# Altium PCB Shield Arduino Manual.PcbDoc
Units mm, origin at the board's own origin, x right, y up, seen from the top; angles counter-clockwise.
Board outline 152.4 x 101.6 mm, 2 copper layers (Top Layer, Bottom Layer); 19 components, 0 nets, 111 pads, 0 vias.
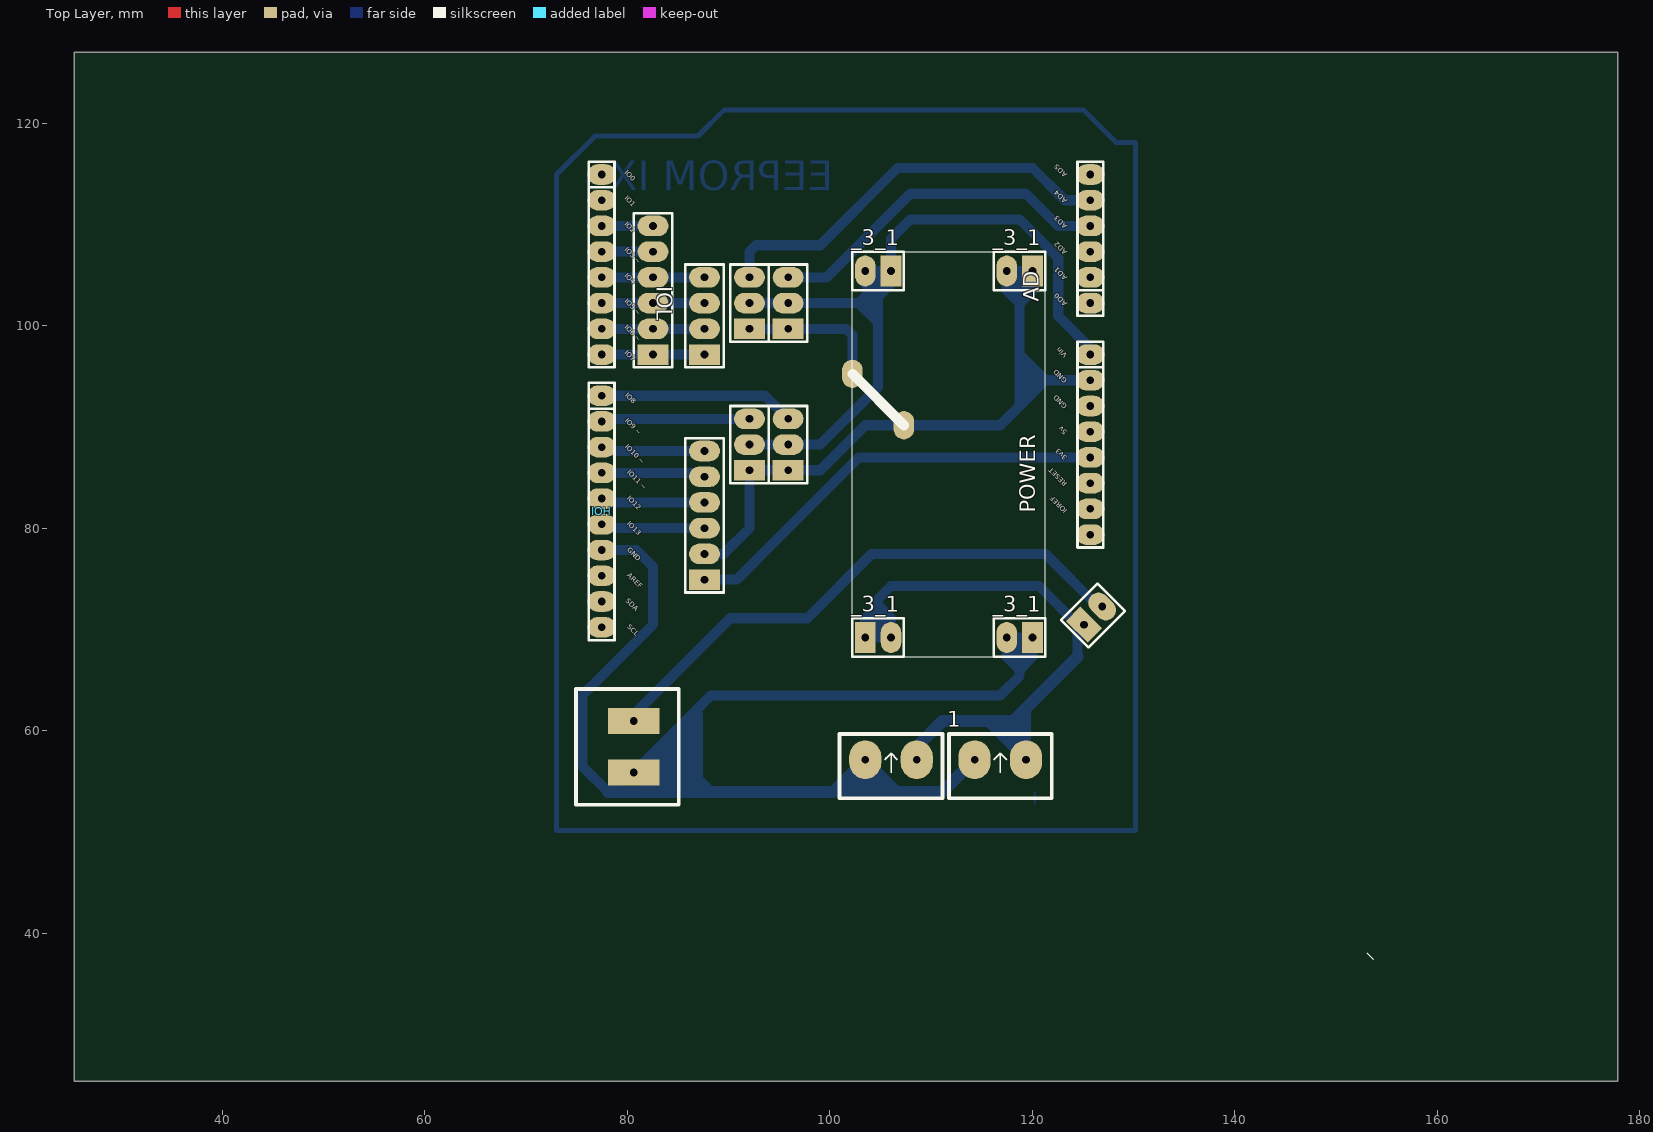
[diagram p0: Top Layer view]
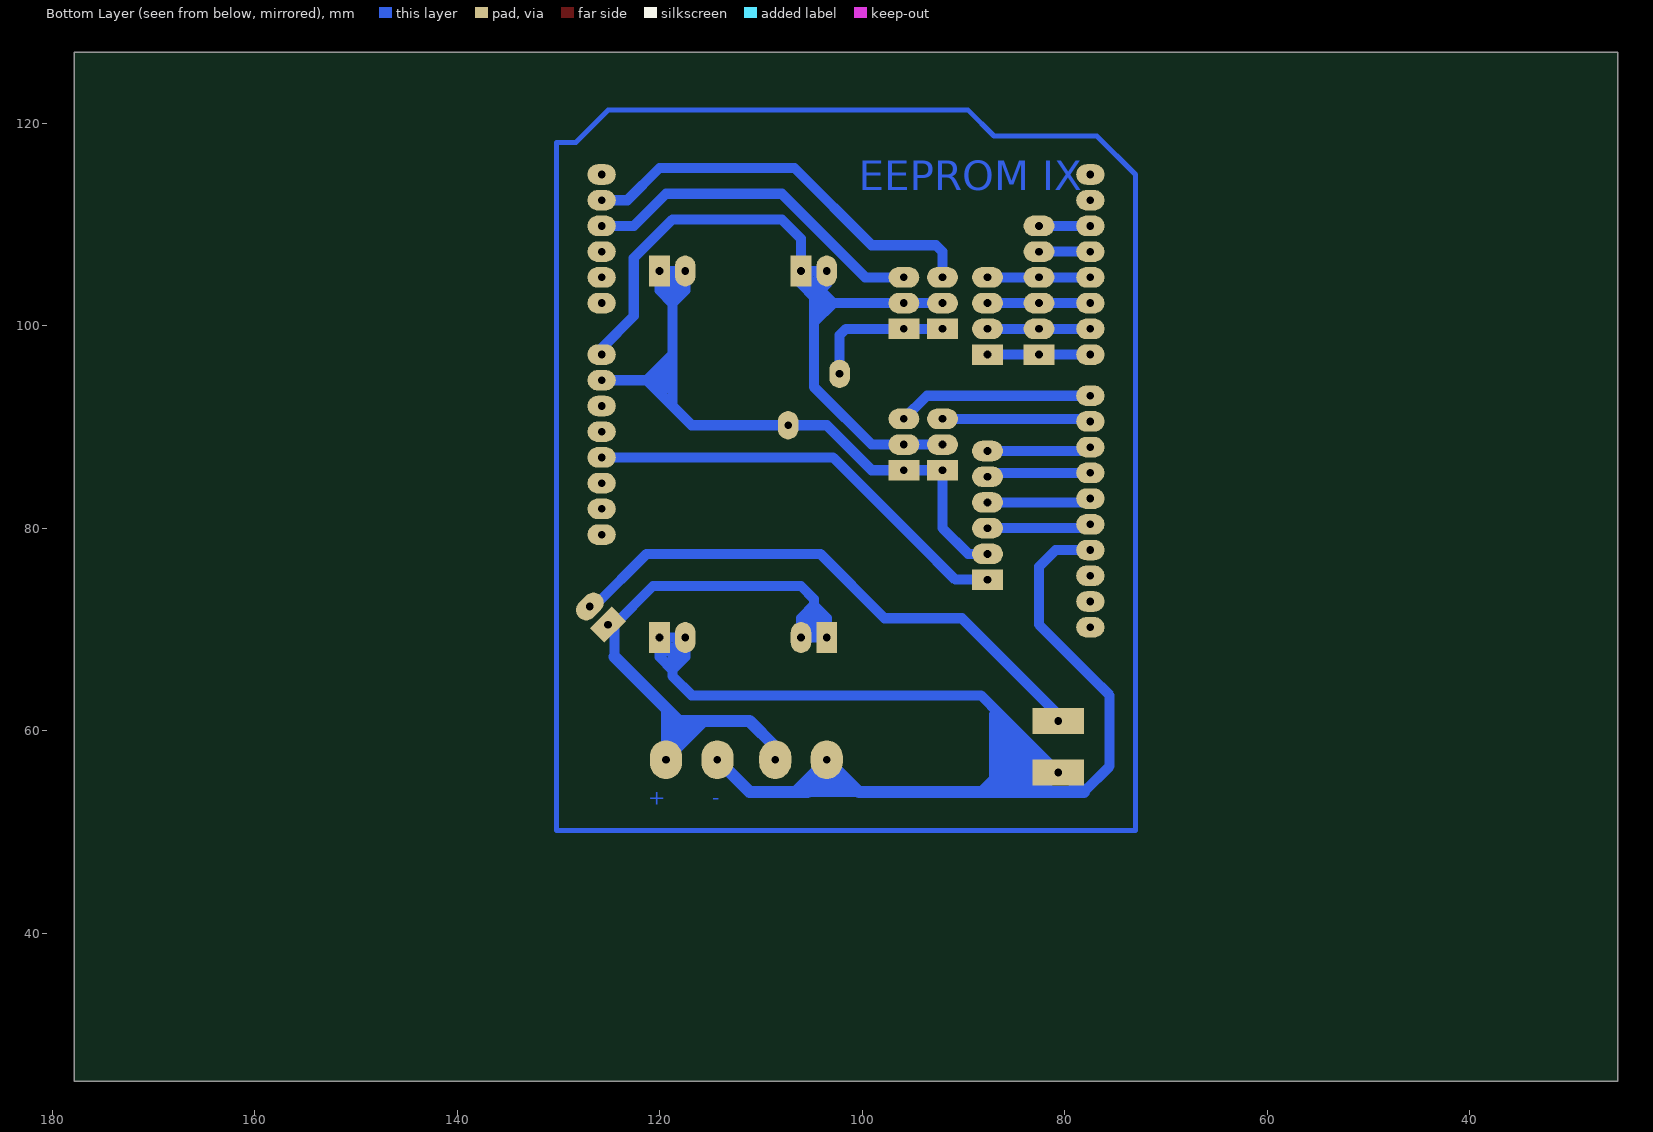
[diagram p1: Bottom Layer view, seen from below]

## Layer stack, top to bottom
Top Layer: signal copper 0.0356
Dielectric: dielectric 0.32, FR-4, Dk 4.8
Bottom Layer: signal copper 0.0356

## Board outline
25.4,25.4 177.8,25.4 177.8,127 25.4,127

## Design rules (kind name [scope] priority, off if disabled: settings)
Clearance [All] p1: gap=0.254
PolygonConnect [All] p1: connectstyle=Relief reliefconductorwidth=0.254 reliefentries=4 polygonreliefangle="90 Angle"
RoutingVias [All] p1: holewidth=0.711 width=1.27 viastyle="Through Hole" minholewidth=0.711 minwidth=1.27 maxholewidth=0.711 maxwidth=1.27
SilkscreenOverComponentPads [All] p1: minsilkscreentomaskgap=0.254
SolderMaskExpansion [All] p1: expansion=0.102
Width [All] p1: maxlimit=0.254 minlimit=0.254 preferedwidth=0.254
27 further rules are at their usual default settings.

## Components (designator, comment, footprint, x,y, rotation, side; value= is the part's Value field where it differs from the comment)
1 "Comment" CON_TSCRW2_STD 114.3,57.15 r0 top
_3_1 "Comment" HDR_1X2-80-120 103.505,69.215 r0 top
_3_1 "Comment" HDR_1X2-80-120 120.015,69.215 r180 top
_3_1 "Comment" HDR_1X2-80-120 120.015,105.41 r180 top
_3_1 "Comment" HDR_1X2-80-120 106.045,105.41 r180 top
AD "AD" "Header 6x1 8.5mm" 125.73,102.235 r90 top locked
IOH "IOH" "Header 10x1 8.5mm" 77.47,93.091 r270 top locked
IOL "IOL" "Header 8x1 8.5mm" 77.47,114.935 r270 top locked
POWER "POWER_UNO" "Header 8x1 8.5mm" 125.73,97.155 r270 top locked
? "Comment" CON_TSCRW2_STD 103.505,57.15 r0 top
? "Comment" SWKOTAK_ONOFF 80.01,58.42 r90 top
? "Comment" HDR_1X2-80-120 125.095,70.485 r45 top
? "Comment" HDR_1X4-80-120 87.63,97.155 r90 top
? "Comment" HDR_1X6-80-120 82.55,97.155 r90 top
? "Comment" HDR_1X3-80-120 92.075,99.695 r90 top
? "Comment" HDR_1X3-80-120 95.885,99.695 r90 top
? "Comment" HDR_1X3-80-120 92.075,85.725 r90 top
? "Comment" HDR_1X3-80-120 95.885,85.725 r90 top
? "Comment" HDR_1X6-80-120 87.63,74.93 r90 top

## Footprints (in the part's own frame and the unit in brackets; to place one, negate y for a bottom-side part, rotate by r counter-clockwise, add the part's x,y. Pads: shape width x height; smd on the part's side, far side on the other; paste and mask are expansions set on the pad)
CON_TSCRW2_STD [mil]
  oval 125x150 hole 30: 1(0,0) 2(200,0)
  silkscreen extent -100,-150 300,100
HDR_1X2-80-120 [mil]
  rect 80x120 hole 30: 1(0,0)
  oval 80x120 hole 30: 2(100,0)
  silkscreen extent -50,-75 150,75
HDR_1X3-80-120 [mil]
  rect 80x120 hole 30: 1(0,0)
  oval 80x120 hole 30: 2(100,0) 3(200,0)
  silkscreen extent -50,-75 250,75
HDR_1X4-80-120 [mil]
  rect 80x120 hole 30: 1(0,0)
  oval 80x120 hole 30: 2(100,0) 3(200,0) 4(300,0)
  silkscreen extent -50,-75 350,75
HDR_1X6-80-120 [mil]
  rect 80x120 hole 30: 1(0,0)
  oval 80x120 hole 30: 2(100,0) 3(200,0) 4(300,0) 5(400,0) 6(500,0)
  silkscreen extent -50,-75 550,75
"Header 6x1 8.5mm" [mil] "Stackable 6 pin header"
  rect 60x60 hole 30: 1(0,0)
  round 60 hole 30: 2(100,0) 3(200,0) 4(300,0) 5(400,0) 6(500,0)
  silkscreen extent -50,-50 550,50, body extent -50,-50 550,50, height 335
"Header 8x1 8.5mm" [mil] "Stackable 8 pin header"
  rect 60x60 hole 30: 1(0,0)
  round 60 hole 30: 2(100,0) 3(200,0) 4(300,0) 5(400,0) 6(500,0) 7(600,0) 8(700,0)
  silkscreen extent -50,-50 750,50, body extent -50,-50 750,50, height 335
"Header 10x1 8.5mm" [mil] "Stackable 10 pin header"
  rect 60x60 hole 30: 1(0,0)
  round 60 hole 30: 2(100,0) 3(200,0) 4(300,0) 5(400,0) 6(500,0) 7(600,0) 8(700,0) 9(800,0) 10(900,0)
  silkscreen extent -50,-50 950,50, body extent -50,-50 950,50, height 335
SWKOTAK_ONOFF [mil]
  rect 100x200 hole 30: 1(-100,-25) 2(100,-25)
  rect 40x40 on Top Overlay: 3(0,0)
  silkscreen extent -225,-200 225,200

## Free pads (board coordinates)
  oval 2.794x2.032 hole 0.762: 0(77.47,70.231) 1(77.47,72.771) 2(77.47,75.311) 3(77.47,77.851) 4(77.47,80.391) 5(77.47,82.931) 6(77.47,85.471) 7(77.47,88.011) 8(77.47,90.551) 9(77.47,93.091) 10(77.47,97.155) 11(77.47,99.695) 12(77.47,102.235) 13(77.47,104.775) 14(77.47,107.315) 15(77.47,109.855) 16(77.47,112.395) 17(77.47,114.935) 18(125.73,114.935) 19(125.73,112.395) 20(125.73,109.855) 21(125.73,107.315) 22(125.73,104.775) 23(125.73,102.235) 24(125.73,97.155) 25(125.73,94.615) 26(125.73,92.075) 27(125.73,89.535) 28(125.73,86.995) 29(125.73,84.455) 30(125.73,81.915) 31(125.73,79.375)
  oval 2.032x2.794 hole 0.762: 0(102.235,95.25) 1(107.315,90.17)

## Nets (pads, with @x,y where several pads share a name; then routed paths per layer and width w, separated by ;. In a path a pad name is that pad's centre, name@x,y a point inside that pad or via, vN(x,y) a via of type N, cw(c..) or ccw(c..) an arc to the next point about the centre after c; other vN are vias at no path point)
pads on no net: 1.1 1.2 ?.1 ?.2 ?.3 ?.4 ?.5 ?.6 _3_1.1 _3_1.2 AD.1 AD.2 AD.3 AD.4 AD.5 AD.6 IOH.1 IOH.2 IOH.3 IOH.4 IOH.5 IOH.6 IOH.7 IOH.8 IOH.9 IOH.10 IOL.1 IOL.2 IOL.3 IOL.4 IOL.5 IOL.6 IOL.7 IOL.8 POWER.1 POWER.2 POWER.3 POWER.4 POWER.5 POWER.6 POWER.7 POWER.8
copper on no net: | length 1383.5
  Bottom Layer w0: 121.285,94.615 125.73,94.615
  Bottom Layer w0.5: 73.025,50.165 73.025,57.15 73.025,114.935 76.835,118.745 86.995,118.745 89.535,121.285 97.79,121.285 125.095,121.285 128.27,118.11 130.175,118.11 130.175,99.695 130.175,50.165 73.025,50.165
  Bottom Layer w0.9: 117.475,69.215 120.015,69.215
  Bottom Layer w1: 77.47,77.851 80.264,77.851 80.899,77.851 82.55,76.2 82.55,70.485 80.645,68.58 77.47,65.405 75.565,63.5 75.565,57.785 75.565,56.515 78.105,53.975 83.185,53.975 ; 77.47,80.391 77.851,80.01 87.63,80.01 ; 77.47,90.551 77.724,90.805 92.075,90.805 ; 77.47,93.091 93.599,93.091 95.885,90.805 ; 77.47,97.155 82.55,97.155 87.63,97.155 ; 77.47,99.695 82.55,99.695 87.63,99.695 ; 77.47,102.235 82.55,102.235 87.63,102.235 ; 77.47,104.775 82.55,104.775 87.63,104.775 ; 77.47,107.315 82.55,107.315 ; 77.47,109.855 82.55,109.855 ; 78.359,82.931 77.47,82.931 77.851,82.55 87.63,82.55 ; 78.359,85.471 77.47,85.471 ; 80.645,60.96 80.645,61.595 90.17,71.12 93.345,71.12 97.79,71.12 104.14,77.47 121.285,77.47 126.474,72.281 126.891,72.281 ; 82.296,85.471 77.47,85.471 ; 87.63,74.93 90.805,74.93 94.615,78.74 102.87,86.995 125.73,86.995 ; 87.63,77.47 89.535,77.47 92.075,80.01 92.075,85.725 95.885,85.725 99.06,85.725 103.505,90.17 104.775,90.17 112.395,90.17 116.84,90.17 121.285,94.615 ; 87.63,85.09 87.249,85.471 77.47,85.471 ; 87.63,87.63 77.851,87.63 ; 92.075,88.265 95.885,88.265 99.06,88.265 104.14,93.345 104.775,93.98 104.775,102.87 ; 92.075,99.695 95.885,99.695 101.6,99.695 102.235,99.06 102.235,95.25 ; 92.075,102.235 95.885,102.235 102.87,102.235 ; 92.075,104.775 92.075,107.315 92.71,107.95 99.06,107.95 106.68,115.57 120.015,115.57 123.19,112.395 125.095,112.395 ; 95.885,104.775 99.695,104.775 107.95,113.03 119.38,113.03 122.555,109.855 125.73,109.855 ; 102.235,53.975 102.87,53.975 103.505,54.61 ; 108.585,57.15 108.585,58.42 111.125,60.96 118.11,60.96 ; 114.3,57.15 111.125,53.975 105.41,53.975 ; 119.38,96.52 119.38,95.25 ; 125.095,70.485 124.46,70.485 ; 125.73,94.615 121.285,94.615 ; 125.73,97.155 125.73,97.79 122.555,100.965 122.555,106.68 118.745,110.49 107.95,110.49 106.045,108.585 106.045,105.41 ; 77.851,87.63 77.47,88.011 77.851,87.63 ; 80.645,55.88 86.36,61.595 ; 80.645,55.88 83.82,55.88 ; 80.645,55.88 82.55,53.975 ; 80.645,55.88 81.28,55.245 ; 81.28,55.245 84.455,55.245 ; 81.28,55.245 85.725,59.69 ; 81.28,55.245 83.185,55.245 83.82,55.88 ; 82.55,53.975 85.725,53.975 ; 82.55,53.975 83.185,53.975 ; 82.55,53.975 83.82,55.245 84.455,55.245 ; 83.185,53.975 86.36,57.15 ; 83.185,53.975 84.455,55.245 ; 83.185,53.975 84.455,55.245 ; 83.185,53.975 84.455,55.245 ; 83.185,53.975 84.455,55.245 ; 83.185,53.975 83.185,57.15 ; 83.185,57.15 85.09,57.15 ; 83.185,57.15 86.36,57.15 ; 83.185,57.15 85.725,59.69 ; 83.82,55.88 86.995,59.055 ; 83.82,55.88 85.725,53.975 ; 83.82,55.88 86.36,55.88 ; 83.82,55.88 84.455,55.245 ; 83.82,55.88 85.09,57.15 ; 83.82,55.88 86.36,55.88 ; 83.82,55.88 85.725,53.975 ; 83.82,55.88 83.82,58.42 ; 83.82,55.88 86.995,59.055 ; 83.82,55.88 85.09,57.15 ; 83.82,55.88 84.455,55.245 ; 83.82,55.88 83.82,58.42 ; 83.82,58.42 83.82,59.055 84.446,59.681 84.455,59.69 ; 83.82,58.42 83.185,57.785 85.725,55.245 ; 84.455,55.245 85.725,53.975 ; 84.455,55.245 84.455,59.69 ; 84.455,55.245 84.455,59.69 ; 84.455,55.245 85.725,55.245 ; 84.455,55.245 84.455,56.515 86.36,58.42 ; 84.455,55.245 85.725,55.245 ; 84.455,59.69 85.09,59.055 ; 85.09,57.15 86.36,57.15 ; 85.09,57.15 86.36,55.88 ; 85.09,57.15 88.265,53.975 ; 85.09,57.15 85.09,59.055 ; 85.09,59.055 86.995,59.055 ; 85.09,59.055 86.36,60.325 ; 85.09,59.055 86.995,59.055 ; 85.09,59.055 85.725,59.69 ; 85.09,59.055 85.725,59.69 ; 85.09,59.055 85.725,58.42 85.725,59.69 ; 85.725,53.975 86.995,55.245 ; 85.725,53.975 85.725,55.245 ; 85.725,53.975 88.265,53.975 ; 85.725,53.975 88.265,53.975 ; 85.725,53.975 86.995,55.245 ; 85.725,53.975 88.265,53.975 ; 85.725,53.975 86.995,55.245 ; 85.725,53.975 86.995,55.245 ; 85.725,53.975 86.995,55.245 ; 85.725,55.245 86.36,55.88 ; 85.725,55.245 86.995,53.975 88.265,53.975 ; 86.36,55.88 86.995,55.245 ; 86.36,55.88 86.36,58.42 ; 86.36,55.88 86.36,57.15 ; 86.36,55.88 86.36,57.15 ; 86.36,57.15 86.995,57.785 86.995,59.055 ; 86.36,58.42 86.995,59.055 ; 86.36,58.42 86.36,61.595 ; 86.36,60.325 86.995,59.69 86.36,60.325 ; 86.36,60.325 86.995,60.96 86.995,59.055 ; 86.36,61.595 86.995,61.595 86.995,59.055 ; 86.36,61.595 88.265,63.5 88.9,63.5 116.84,63.5 118.745,65.405 118.745,66.04 ; 86.995,55.245 88.265,53.975 ; 86.995,55.245 88.265,53.975 ; 86.995,55.245 88.265,53.975 ; 86.995,55.245 88.265,53.975 ; 86.995,55.245 88.265,53.975 ; 86.995,55.245 86.995,59.055 ; 88.265,53.975 105.41,53.975 ; 102.87,102.235 104.775,100.33 104.14,100.965 104.14,102.235 ; 102.87,102.235 104.775,104.14 ; 102.87,102.235 104.775,104.14 ; 102.87,102.235 104.14,102.235 ; 103.505,53.975 103.505,55.88 ; 103.505,53.975 101.6,53.975 103.505,55.88 ; 103.505,53.975 103.505,55.88 ; 103.505,53.975 103.505,55.88 ; 103.505,53.975 103.505,57.15 ; 103.505,54.61 104.775,54.61 103.505,54.61 ; 103.505,54.61 103.505,55.88 ; 103.505,55.88 105.41,53.975 ; 103.505,57.15 106.68,53.975 105.41,53.975 ; 103.505,57.15 100.33,53.975 103.505,57.15 ; 103.505,69.215 106.045,69.215 ; 103.505,69.215 106.045,69.215 ; 103.505,69.215 103.505,71.12 ; 103.505,71.12 104.775,72.39 ; 103.505,71.12 106.045,71.12 ; 103.505,71.12 106.045,71.12 ; 103.505,71.12 104.775,69.85 ; 103.505,71.12 104.775,69.85 ; 103.505,104.14 103.505,105.41 ; 103.505,104.14 104.775,102.87 ; 103.505,104.14 104.775,104.14 ; 103.505,104.14 104.775,104.14 ; 103.505,105.41 106.045,105.41 ; 103.505,105.41 106.045,105.41 ; 103.505,105.41 104.775,104.14 ; 103.505,105.41 106.045,105.41 ; 103.505,105.41 106.045,105.41 ; 104.14,102.235 104.775,102.87 ; 104.14,102.235 104.775,102.87 ; 104.775,69.85 103.505,69.85 104.14,69.215 106.045,71.12 ; 104.775,69.85 106.045,71.12 ; 104.775,69.85 106.045,71.12 ; 104.775,69.85 104.775,72.39 ; 104.775,72.39 106.045,71.12 ; 104.775,72.39 106.045,71.12 ; 104.775,72.39 104.775,73.025 106.045,74.295 114.935,74.295 120.65,74.295 124.46,70.485 ; 104.775,102.87 106.045,104.14 106.045,105.41 ; 104.775,102.87 104.775,104.14 ; 104.775,104.14 106.045,105.41 ; 106.045,69.215 106.045,71.12 ; 115.57,60.96 118.11,58.42 ; 115.57,60.96 118.11,60.96 ; 115.57,60.96 118.11,60.96 ; 115.57,60.96 118.11,60.96 ; 115.57,60.96 118.11,60.96 ; 115.57,60.96 118.11,60.96 ; 115.57,60.96 118.11,60.96 ; 115.57,60.96 119.38,57.15 ; 116.84,59.69 118.11,60.96 ; 116.84,59.69 118.11,60.96 ; 116.84,59.69 118.11,60.96 ; 116.84,59.69 119.38,59.69 ; 117.475,67.31 117.475,69.215 ; 117.475,67.31 118.745,66.04 ; 117.475,67.31 117.475,69.215 ; 117.475,67.31 118.11,67.31 120.015,69.215 ; 117.475,69.215 120.015,69.215 ; 117.475,69.215 118.745,67.945 ; 117.475,69.215 118.745,67.945 ; 117.475,103.505 117.475,105.41 ; 117.475,103.505 118.745,102.235 120.015,103.505 ; 117.475,103.505 119.38,105.41 ; 117.475,103.505 120.015,103.505 ; 117.475,103.505 119.38,105.41 ; 117.475,103.505 118.745,103.505 ; 117.475,105.41 120.015,105.41 ; 117.475,105.41 120.015,105.41 ; 118.11,58.42 119.38,59.69 ; 118.11,58.42 118.11,60.96 ; 118.11,58.42 119.38,57.15 ; 118.11,60.96 119.38,59.69 ; 118.11,60.96 119.38,62.23 ; 118.11,60.96 114.935,60.96 118.11,60.96 ; 118.11,60.96 119.38,62.23 ; 118.11,60.96 119.38,59.69 ; 118.11,60.96 119.38,59.69 ; 118.11,60.96 119.38,59.69 ; 118.11,60.96 119.38,59.69 ; 118.11,60.96 119.38,62.23 ; 118.745,66.04 120.015,67.31 ; 118.745,66.04 118.745,67.945 ; 118.745,67.945 119.38,67.945 120.015,67.31 ; 118.745,92.075 118.745,97.155 ; 118.745,92.075 118.745,97.155 ; 118.745,92.075 118.745,94.615 ; 118.745,92.075 118.745,94.615 ; 118.745,92.075 118.745,94.556 118.765,94.576 118.765,94.595 120.005,93.355 ; 118.745,92.075 120.005,93.335 ; 118.745,94.615 121.285,94.615 ; 118.745,94.615 118.745,97.155 ; 118.745,94.615 121.285,94.615 ; 118.745,94.615 118.745,97.155 ; 118.745,94.615 118.745,97.155 ; 118.745,94.615 118.745,97.155 ; 118.745,94.615 118.745,97.155 ; 118.745,94.615 119.38,95.25 ; 118.745,94.615 118.745,94.595 120.005,93.335 ; 118.745,94.615 120.005,93.355 ; 118.745,97.155 121.285,94.615 ; 118.745,97.155 118.745,103.505 ; 118.745,97.155 121.285,94.615 ; 118.745,97.155 121.285,94.615 ; 118.745,103.505 120.015,104.775 ; 119.38,57.15 119.38,59.69 ; 119.38,59.69 119.38,62.23 ; 119.38,59.69 119.38,62.23 ; 119.38,62.23 124.46,67.31 124.46,69.215 124.46,70.485 ; 119.38,95.25 120.65,95.25 120.65,94 120.005,93.355 ; 119.38,105.41 120.015,105.41 ; 119.38,105.41 120.015,104.775 ; 119.38,105.41 120.015,104.775 ; 120.005,93.335 120.005,93.355 ; 120.005,93.335 120.005,93.355 ; 120.005,93.355 120.005,94.605 120.005,93.355 ; 120.015,67.31 120.015,69.215 ; 120.015,67.31 120.015,69.215 ; 120.015,69.215 120.355,68.875 120.015,69.215 ; 120.015,103.505 120.015,105.41 ; 120.015,103.505 120.015,104.775 ; 125.095,112.395 125.73,112.395 125.095,112.395
  Bottom Layer w1.2: 81.28,55.245 79.375,55.245 78.105,53.975 83.185,53.975 100.33,53.975 103.505,57.15 ; 103.505,55.88 105.41,53.975 106.68,53.975 111.125,53.975 114.3,57.15 ; 108.585,57.15 108.585,58.42 111.125,60.96 118.11,60.96 119.38,62.23 124.46,67.31

## Other copper
Bottom Layer:
  text "EEPROM IX" at 100.33,112.395 h5
  text "-" at 114.046,52.705 h1.52
  text "+" at 119.38,52.705 h1.52

## Silkscreen, mask and mechanical layers (free items; w line width, h text height)
Top Overlay:
  lines w0.1: 153.035,38.1 153.67,37.465 ; 102.235,67.31 102.235,86.995 102.235,107.315 114.3,107.315 121.285,107.315 121.285,67.31 102.235,67.31
  lines w1: 106.045,91.44 102.235,95.25 107.315,90.17
  text "IO0" at 79.682,115.062 h0.51 r315
  text "AD5" at 123.518,114.935 h0.51 r135
  text "IO1" at 79.682,112.522 h0.51 r315
  text "AD4" at 123.518,112.395 h0.51 r135
  text "IO2" at 79.682,109.982 h0.51 r315
  text "AD3" at 123.518,109.855 h0.51 r135
  text "IO3 ~" at 79.682,107.442 h0.51 r315
  text "AD2" at 123.518,107.315 h0.51 r135
  text "IO4" at 79.682,104.902 h0.51 r315
  text "AD1" at 123.518,104.775 h0.51 r135
  text "IO5 ~" at 79.682,102.362 h0.51 r315
  text "AD0" at 123.518,102.235 h0.51 r135
  text "IO6 ~" at 79.682,99.822 h0.51 r315
  text "IO7" at 79.682,97.282 h0.51 r315
  text "Vin" at 123.518,97.155 h0.51 r135
  text "GND" at 123.518,94.615 h0.51 r135
  text "IO8" at 79.756,93.091 h0.51 r315
  text "GND" at 123.518,92.075 h0.51 r135
  text "IO9 ~" at 79.756,90.551 h0.51 r315
  text "5v" at 123.518,89.535 h0.51 r135
  text "IO10 ~" at 79.756,88.011 h0.51 r315
  text "3v3" at 123.518,86.995 h0.51 r135
  text "IO11 ~" at 79.936,85.471 h0.51 r315
  text "RESET" at 123.518,84.455 h0.51 r135
  text "IO12" at 79.936,82.931 h0.51 r315
  text "IOREF" at 123.518,81.788 h0.51 r135
  text "IO13" at 79.936,80.391 h0.51 r315
  text "GND" at 79.936,77.851 h0.51 r315
  text "AREF" at 79.936,75.311 h0.51 r315
  text "SDA" at 79.809,72.771 h0.51 r315
  text "SCL" at 79.936,70.231 h0.51 r315
Mechanical 1:
  lines w0.127: 74.93,51.435 128.27,51.435 128.27,117.475 127,117.475 124.46,120.015 90.17,120.015 87.63,117.475 77.47,117.475 74.93,114.935 74.93,51.435